# Altium PCB PCB copy.pcbdoc (part 2 of 2)
Units mm, origin at the board's own origin, x right, y up, seen from the top; angles counter-clockwise.
Board outline 125.72 x 116.32 mm, 2 copper layers (Top Layer, Bottom Layer); 242 components, 12 nets, 720 pads, 72 vias.
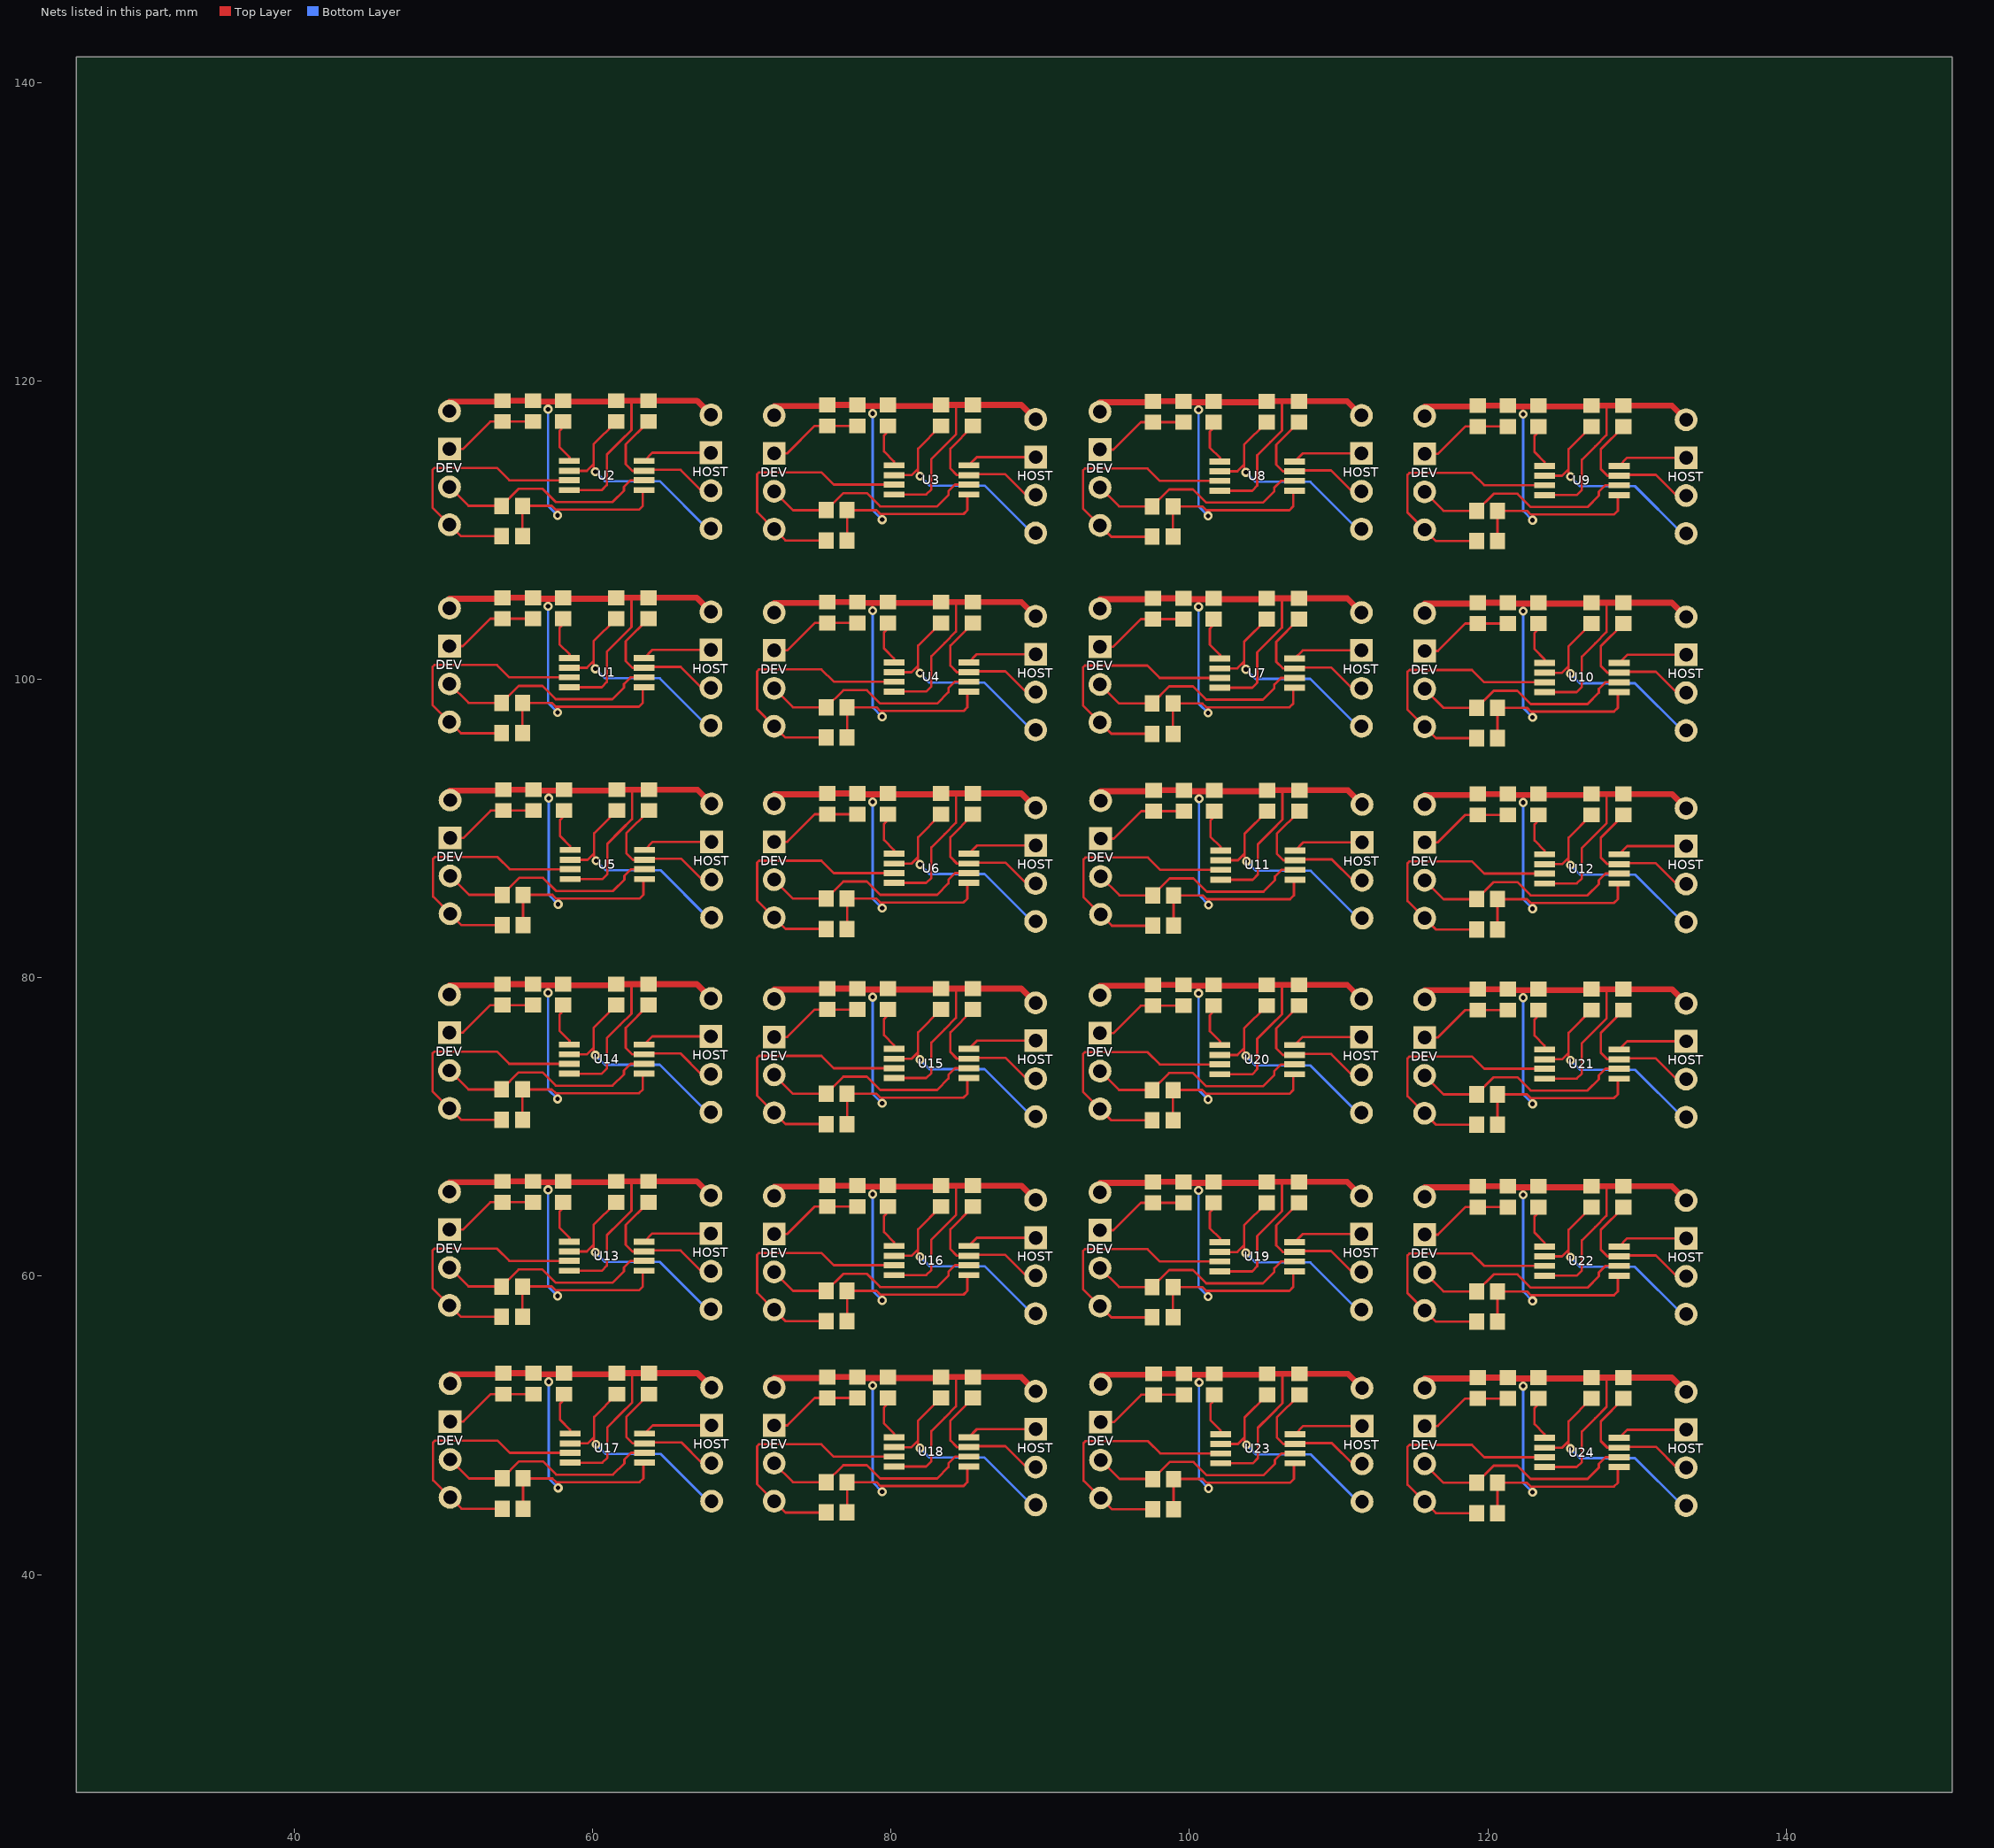
[diagram p2: the nets of this part, all layers, seen from the top]

## Via types
v1: diameter 0.61, hole 0.305, Top Layer to Bottom Layer, 72 vias

## Nets (pads, with @x,y where several pads share a name; then routed paths per layer and width w, separated by ;. In a path a pad name is that pad's centre, name@x,y a point inside that pad or via, vN(x,y) a via of type N, cw(c..) or ccw(c..) an arc to the next point about the centre after c; other vN are vias at no path point)
3.3VI2C: C1.1 C2.1 C3.1 C4.1 C5.1 C6.1 C7.1 C8.1 C9.1 C10.1 C11.1 C12.1 C13.1 C14.1 C15.1 C16.1 C17.1 C18.1 C19.1 C20.1 C21.1 C22.1 C23.1 C24.1 C25.1 C26.1 C27.1 C28.1 C29.1 C30.1 C31.1 C32.1 C33.1 C34.1 C35.1 C36.1 C37.1 C38.1 C39.1 C40.1 C41.1 C42.1 C43.1 C44.1 C45.1 C46.1 C47.1 C48.1 DEV.4 HOST.4 R1.2 R2.2 R3.2 R4.2 R5.2 R6.2 R7.2 R8.2 R9.2 R10.2 R11.2 R12.2 R13.2 R14.2 R15.2 R16.2 R17.2 R18.2 R19.2 R20.2 R21.2 R22.2 R23.2 R24.2 R25.2 R26.2 R27.2 R28.2 R29.2 R30.2 R31.2 R32.2 R33.2 R34.2 R35.2 R36.2 R37.2 R38.2 R39.2 R40.2 R41.2 R42.2 R43.2 R44.2 R45.2 R46.2 R47.2 R48.2 R49.2 R50.2 R51.2 R52.2 R53.2 R54.2 R55.2 R56.2 R57.2 R58.2 R59.2 R60.2 R61.2 R62.2 R63.2 R64.2 R65.2 R66.2 R67.2 R68.2 R69.2 R70.2 R71.2 R72.2 R73.2 R74.2 R75.2 R76.2 R77.2 R78.2 R79.2 R80.2 R81.2 R82.2 R83.2 R84.2 R85.2 R86.2 R87.2 R88.2 R89.2 R90.2 R91.2 R92.2 R93.2 R94.2 R95.2 R96.2 R97.2 R98.2 R99.2 R100.2 R101.2 R102.2 R103.2 R104.2 R105.2 R106.2 R107.2 R108.2 R109.2 R110.2 R111.2 R112.2 R113.2 R114.2 R115.2 R116.2 R117.2 R118.2 R119.2 R120.2 U1.1 U1.8 U2.1 U2.8 U3.1 U3.8 U4.1 U4.8 U5.1 U5.8 U6.1 U6.8 U7.1 U7.8 U8.1 U8.8 U9.1 U9.8 U10.1 U10.8 U11.1 U11.8 U12.1 U12.8 U13.1 U13.8 U14.1 U14.8 U15.1 U15.8 U16.1 U16.8 U17.1 U17.8 U18.1 U18.8 U19.1 U19.8 U20.1 U20.8 U21.1 U21.8 U22.1 U22.8 U23.1 U23.8 U24.1 U24.8 | length 1137.8
  Top Layer w0.16: R65.2@55.301,57.277 R64.2@55.301,59.309 57.268,59.309 57.522,59.055 63.11,59.055 63.364,59.309 63.364,60.274 U13.1@63.453,60.363 ; R70.2@55.301,70.485 R69.2@55.301,72.517 57.268,72.517 57.522,72.263 63.11,72.263 63.364,72.517 63.364,73.482 U14.1@63.453,73.571 ; R3.2@55.301,96.393 R1.2@55.301,98.425 57.268,98.425 57.522,98.171 63.11,98.171 63.364,98.425 63.364,99.39 U1.1@63.453,99.479 ; R10.2@55.301,109.601 R9.2@55.301,111.633 57.268,111.633 57.522,111.379 63.11,111.379 63.364,111.633 63.364,112.598 U2.1@63.453,112.687 ; R85.2@55.339,44.412 R84.2@55.339,46.444 57.306,46.444 57.56,46.19 63.148,46.19 63.402,46.444 63.402,47.409 U17.1@63.491,47.498 ; R25.2@55.339,83.528 R24.2@55.339,85.56 57.306,85.56 57.56,85.306 63.148,85.306 63.402,85.56 63.402,86.525 U5.1@63.491,86.614 ; 57.001,66.294 57.001,65.799 v1(57.014,65.786) ; 57.001,79.502 57.001,79.007 v1(57.014,78.994) ; 57.001,105.41 57.001,104.915 v1(57.014,104.902) ; 57.001,118.618 57.001,118.123 v1(57.014,118.11) ; 57.039,53.429 57.039,52.934 v1(57.052,52.921) ; 57.039,92.545 57.039,92.05 v1(57.052,92.037) ; v1(57.649,58.674) 57.65,58.675 57.65,59.055 ; v1(57.649,71.882) 57.65,71.883 57.65,72.263 ; v1(57.649,97.79) 57.65,97.791 57.65,98.171 ; v1(57.649,110.998) 57.65,110.999 57.65,111.379 ; v1(57.687,45.809) 57.689,45.81 57.689,46.19 ; v1(57.687,84.925) 57.689,84.926 57.689,85.306 ; U13.8@58.449,60.363 60.608,60.363 60.951,60.706 60.951,61.849 60.951,62.738 61.84,63.627 62.602,64.389 62.602,64.897 62.602,66.341 62.62,66.359 ; U14.8@58.449,73.571 60.608,73.571 60.951,73.914 60.951,75.057 60.951,75.946 61.84,76.835 62.602,77.597 62.602,78.105 62.602,79.549 62.62,79.567 ; U1.8@58.449,99.479 60.608,99.479 60.951,99.822 60.951,100.965 60.951,101.854 61.84,102.743 62.602,103.505 62.602,104.013 62.602,105.457 62.62,105.475 ; U2.8@58.449,112.687 60.608,112.687 60.951,113.03 60.951,114.173 60.951,115.062 61.84,115.951 62.602,116.713 62.602,117.221 62.602,118.665 62.62,118.683 ; U17.8@58.487,47.498 60.646,47.498 60.989,47.841 60.989,48.984 60.989,49.873 61.878,50.762 62.64,51.524 62.64,52.032 62.64,53.476 62.658,53.494 ; U5.8@58.487,86.614 60.646,86.614 60.989,86.957 60.989,88.1 60.989,88.989 61.878,89.878 62.64,90.64 62.64,91.148 62.64,92.592 62.658,92.61 ; R90.2@77.056,44.158 R89.2@77.056,46.19 79.023,46.19 79.277,45.936 84.865,45.936 85.119,46.19 85.119,47.155 U18.1@85.208,47.244 ; R80.2@77.056,56.985 R79.2@77.056,59.017 79.023,59.017 79.277,58.763 84.865,58.763 85.119,59.017 85.119,59.982 U16.1@85.208,60.071 ; R75.2@77.056,70.193 R74.2@77.056,72.225 79.023,72.225 79.277,71.971 84.865,71.971 85.119,72.225 85.119,73.19 U15.1@85.208,73.279 ; R30.2@77.056,83.274 R29.2@77.056,85.306 79.023,85.306 79.277,85.052 84.865,85.052 85.119,85.306 85.119,86.271 U6.1@85.208,86.36 ; R20.2@77.056,96.101 R19.2@77.056,98.133 79.023,98.133 79.277,97.879 84.865,97.879 85.119,98.133 85.119,99.098 U4.1@85.208,99.187 ; R15.2@77.056,109.309 R14.2@77.056,111.341 79.023,111.341 79.277,111.087 84.865,111.087 85.119,111.341 85.119,112.306 U3.1@85.208,112.395 ; 78.756,53.175 78.756,52.68 v1(78.769,52.667) ; 78.756,66.002 78.756,65.507 v1(78.769,65.494) ; 78.756,79.21 78.756,78.715 v1(78.769,78.702) ; 78.756,92.291 78.756,91.796 v1(78.769,91.783) ; 78.756,105.118 78.756,104.623 v1(78.769,104.61) ; 78.756,118.326 78.756,117.831 v1(78.769,117.818) ; v1(79.404,45.555) 79.406,45.556 79.406,45.936 ; v1(79.404,58.382) 79.406,58.383 79.406,58.763 ; v1(79.404,71.59) 79.406,71.591 79.406,71.971 ; v1(79.404,84.671) 79.406,84.672 79.406,85.052 ; v1(79.404,97.498) 79.406,97.499 79.406,97.879 ; v1(79.404,110.706) 79.406,110.707 79.406,111.087 ; U18.8@80.204,47.244 82.363,47.244 82.706,47.587 82.706,48.73 82.706,49.619 83.595,50.508 84.357,51.27 84.357,51.778 84.357,53.222 84.375,53.24 ; U16.8@80.204,60.071 82.363,60.071 82.706,60.414 82.706,61.557 82.706,62.446 83.595,63.335 84.357,64.097 84.357,64.605 84.357,66.049 84.375,66.067 ; U15.8@80.204,73.279 82.363,73.279 82.706,73.622 82.706,74.765 82.706,75.654 83.595,76.543 84.357,77.305 84.357,77.813 84.357,79.257 84.375,79.275 ; U6.8@80.204,86.36 82.363,86.36 82.706,86.703 82.706,87.846 82.706,88.735 83.595,89.624 84.357,90.386 84.357,90.894 84.357,92.338 84.375,92.356 ; U4.8@80.204,99.187 82.363,99.187 82.706,99.53 82.706,100.673 82.706,101.562 83.595,102.451 84.357,103.213 84.357,103.721 84.357,105.165 84.375,105.183 ; U3.8@80.204,112.395 82.363,112.395 82.706,112.738 82.706,113.881 82.706,114.77 83.595,115.659 84.357,116.421 84.357,116.929 84.357,118.373 84.375,118.391 ; R95.2@98.9,57.239 R94.2@98.9,59.271 100.867,59.271 101.121,59.017 106.709,59.017 106.963,59.271 106.963,60.236 U19.1@107.052,60.325 ; R100.2@98.9,70.447 R99.2@98.9,72.479 100.867,72.479 101.121,72.225 106.709,72.225 106.963,72.479 106.963,73.444 U20.1@107.052,73.533 ; R35.2@98.9,96.355 R34.2@98.9,98.387 100.867,98.387 101.121,98.133 106.709,98.133 106.963,98.387 106.963,99.352 U7.1@107.052,99.441 ; R40.2@98.9,109.563 R39.2@98.9,111.595 100.867,111.595 101.121,111.341 106.709,111.341 106.963,111.595 106.963,112.56 U8.1@107.052,112.649 ; R115.2@98.938,44.374 R114.2@98.938,46.406 100.905,46.406 101.159,46.152 106.747,46.152 107.001,46.406 107.001,47.371 U23.1@107.09,47.46 ; R55.2@98.938,83.49 R54.2@98.938,85.522 100.905,85.522 101.159,85.268 106.747,85.268 107.001,85.522 107.001,86.487 U11.1@107.09,86.576 ; 100.6,66.256 100.6,65.761 v1(100.613,65.748) ; 100.6,79.464 100.6,78.969 v1(100.613,78.956) ; 100.6,105.372 100.6,104.877 v1(100.613,104.864) ; 100.6,118.58 100.6,118.085 v1(100.613,118.072) ; 100.639,53.391 100.639,52.896 v1(100.651,52.883) ; 100.639,92.507 100.639,92.012 v1(100.651,91.999) ; v1(101.248,58.636) 101.25,58.637 101.25,59.017 ; v1(101.248,71.844) 101.25,71.845 101.25,72.225 ; v1(101.248,97.752) 101.25,97.753 101.25,98.133 ; v1(101.248,110.96) 101.25,110.961 101.25,111.341 ; v1(101.286,45.771) 101.288,45.772 101.288,46.152 ; v1(101.286,84.887) 101.288,84.888 101.288,85.268 ; U19.8@102.048,60.325 104.207,60.325 104.55,60.668 104.55,61.811 104.55,62.7 105.439,63.589 106.201,64.351 106.201,64.859 106.201,66.303 106.219,66.321 ; U20.8@102.048,73.533 104.207,73.533 104.55,73.876 104.55,75.019 104.55,75.908 105.439,76.797 106.201,77.559 106.201,78.067 106.201,79.511 106.219,79.529 ; U7.8@102.048,99.441 104.207,99.441 104.55,99.784 104.55,100.927 104.55,101.816 105.439,102.705 106.201,103.467 106.201,103.975 106.201,105.419 106.219,105.437 ; U8.8@102.048,112.649 104.207,112.649 104.55,112.992 104.55,114.135 104.55,115.024 105.439,115.913 106.201,116.675 106.201,117.183 106.201,118.627 106.219,118.645 ; U23.8@102.086,47.46 104.245,47.46 104.588,47.803 104.588,48.946 104.588,49.835 105.477,50.724 106.239,51.486 106.239,51.994 106.239,53.438 106.257,53.456 ; U11.8@102.086,86.576 104.245,86.576 104.588,86.919 104.588,88.062 104.588,88.951 105.477,89.84 106.239,90.602 106.239,91.11 106.239,92.554 106.257,92.572 ; R120.2@120.655,44.12 R119.2@120.655,46.152 122.622,46.152 122.876,45.898 128.464,45.898 128.718,46.152 128.718,47.117 U24.1@128.807,47.206 ; R110.2@120.655,56.947 R109.2@120.655,58.979 122.622,58.979 122.876,58.725 128.464,58.725 128.718,58.979 128.718,59.944 U22.1@128.807,60.033 ; R105.2@120.655,70.155 R104.2@120.655,72.187 122.622,72.187 122.876,71.933 128.464,71.933 128.718,72.187 128.718,73.152 U21.1@128.807,73.241 ; R60.2@120.655,83.236 R59.2@120.655,85.268 122.622,85.268 122.876,85.014 128.464,85.014 128.718,85.268 128.718,86.233 U12.1@128.807,86.322 ; R50.2@120.655,96.063 R49.2@120.655,98.095 122.622,98.095 122.876,97.841 128.464,97.841 128.718,98.095 128.718,99.06 U10.1@128.807,99.149 ; R45.2@120.655,109.271 R44.2@120.655,111.303 122.622,111.303 122.876,111.049 128.464,111.049 128.718,111.303 128.718,112.268 U9.1@128.807,112.357 ; 122.356,53.137 122.356,52.642 v1(122.368,52.629) ; 122.356,65.964 122.356,65.469 v1(122.368,65.456) ; 122.356,79.172 122.356,78.677 v1(122.368,78.664) ; 122.356,92.253 122.356,91.758 v1(122.368,91.745) ; 122.356,105.08 122.356,104.585 v1(122.368,104.572) ; 122.356,118.288 122.356,117.793 v1(122.368,117.78) ; v1(123.003,45.517) 123.005,45.518 123.005,45.898 ; v1(123.003,58.344) 123.005,58.345 123.005,58.725 ; v1(123.003,71.552) 123.005,71.553 123.005,71.933 ; v1(123.003,84.633) 123.005,84.634 123.005,85.014 ; v1(123.003,97.46) 123.005,97.461 123.005,97.841 ; v1(123.003,110.668) 123.005,110.669 123.005,111.049 ; U24.8@123.803,47.206 125.962,47.206 126.305,47.549 126.305,48.692 126.305,49.581 127.194,50.47 127.956,51.232 127.956,51.74 127.956,53.184 127.974,53.202 ; U22.8@123.803,60.033 125.962,60.033 126.305,60.376 126.305,61.519 126.305,62.408 127.194,63.297 127.956,64.059 127.956,64.567 127.956,66.011 127.974,66.029 ; U21.8@123.803,73.241 125.962,73.241 126.305,73.584 126.305,74.727 126.305,75.616 127.194,76.505 127.956,77.267 127.956,77.775 127.956,79.219 127.974,79.237 ; U12.8@123.803,86.322 125.962,86.322 126.305,86.665 126.305,87.808 126.305,88.697 127.194,89.586 127.956,90.348 127.956,90.856 127.956,92.3 127.974,92.318 ; U10.8@123.803,99.149 125.962,99.149 126.305,99.492 126.305,100.635 126.305,101.524 127.194,102.413 127.956,103.175 127.956,103.683 127.956,105.127 127.974,105.145 ; U9.8@123.803,112.357 125.962,112.357 126.305,112.7 126.305,113.843 126.305,114.732 127.194,115.621 127.956,116.383 127.956,116.891 127.956,118.335 127.974,118.353
  Top Layer w0.4: DEV.4@50.41,65.659 50.41,66.294 53.9,66.294 C26.1@53.966,66.359 ; DEV.4@50.41,78.867 50.41,79.502 53.9,79.502 C28.1@53.966,79.567 ; DEV.4@50.41,104.775 50.41,105.41 53.9,105.41 C2.1@53.966,105.475 ; DEV.4@50.41,117.983 50.41,118.618 53.9,118.618 C4.1@53.966,118.683 ; DEV.4@50.448,52.794 50.448,53.429 53.938,53.429 C34.1@54.004,53.494 ; DEV.4@50.448,91.91 50.448,92.545 53.938,92.545 C10.1@54.004,92.61 ; C26.1@53.966,66.359 55.49,66.359 C25.1@55.998,66.359 ; C28.1@53.966,79.567 55.49,79.567 C27.1@55.998,79.567 ; C2.1@53.966,105.475 55.49,105.475 C1.1@55.998,105.475 ; C4.1@53.966,118.683 55.49,118.683 C3.1@55.998,118.683 ; C34.1@54.004,53.494 55.528,53.494 C33.1@56.036,53.494 ; C10.1@54.004,92.61 55.528,92.61 C9.1@56.036,92.61 ; C25.1@56.125,66.294 R63.2@58.03,66.294 ; C27.1@56.125,79.502 R68.2@58.03,79.502 ; C1.1@56.125,105.41 R5.2@58.03,105.41 ; C3.1@56.125,118.618 R8.2@58.03,118.618 ; C33.1@56.163,53.429 R83.2@58.068,53.429 ; C9.1@56.163,92.545 R23.2@58.068,92.545 ; R63.2@58.03,66.359 57.903,66.294 61.52,66.294 R62.2@61.586,66.359 ; R68.2@58.03,79.567 57.903,79.502 61.52,79.502 R67.2@61.586,79.567 ; R5.2@58.03,105.475 57.903,105.41 61.52,105.41 R4.2@61.586,105.475 ; R8.2@58.03,118.683 57.903,118.618 61.52,118.618 R7.2@61.586,118.683 ; R83.2@58.068,53.494 57.941,53.429 61.558,53.429 R82.2@61.624,53.494 ; R23.2@58.068,92.61 57.941,92.545 61.558,92.545 R22.2@61.624,92.61 ; R62.2@61.586,66.359 R61.2@63.745,66.359 66.982,66.359 HOST.4@67.936,65.405 ; R67.2@61.586,79.567 R66.2@63.745,79.567 66.982,79.567 HOST.4@67.936,78.613 ; R4.2@61.586,105.475 R2.2@63.745,105.475 66.982,105.475 HOST.4@67.936,104.521 ; R7.2@61.586,118.683 R6.2@63.745,118.683 66.982,118.683 HOST.4@67.936,117.729 ; R82.2@61.624,53.494 R81.2@63.783,53.494 67.02,53.494 HOST.4@67.974,52.54 ; R22.2@61.624,92.61 R21.2@63.783,92.61 67.02,92.61 HOST.4@67.974,91.656 ; DEV.4@72.165,52.54 72.165,53.175 75.655,53.175 C36.1@75.721,53.24 ; DEV.4@72.165,65.367 72.165,66.002 75.655,66.002 C32.1@75.721,66.067 ; DEV.4@72.165,78.575 72.165,79.21 75.655,79.21 C30.1@75.721,79.275 ; DEV.4@72.165,91.656 72.165,92.291 75.655,92.291 C12.1@75.721,92.356 ; DEV.4@72.165,104.483 72.165,105.118 75.655,105.118 C8.1@75.721,105.183 ; DEV.4@72.165,117.691 72.165,118.326 75.655,118.326 C6.1@75.721,118.391 ; C36.1@75.721,53.24 77.245,53.24 C35.1@77.753,53.24 ; C32.1@75.721,66.067 77.245,66.067 C31.1@77.753,66.067 ; C30.1@75.721,79.275 77.245,79.275 C29.1@77.753,79.275 ; C12.1@75.721,92.356 77.245,92.356 C11.1@77.753,92.356 ; C8.1@75.721,105.183 77.245,105.183 C7.1@77.753,105.183 ; C6.1@75.721,118.391 77.245,118.391 C5.1@77.753,118.391 ; C35.1@77.88,53.175 R88.2@79.785,53.175 ; C31.1@77.88,66.002 R78.2@79.785,66.002 ; C29.1@77.88,79.21 R73.2@79.785,79.21 ; C11.1@77.88,92.291 R28.2@79.785,92.291 ; C7.1@77.88,105.118 R18.2@79.785,105.118 ; C5.1@77.88,118.326 R13.2@79.785,118.326 ; R88.2@79.785,53.24 79.658,53.175 83.275,53.175 R87.2@83.341,53.24 ; R78.2@79.785,66.067 79.658,66.002 83.275,66.002 R77.2@83.341,66.067 ; R73.2@79.785,79.275 79.658,79.21 83.275,79.21 R72.2@83.341,79.275 ; R28.2@79.785,92.356 79.658,92.291 83.275,92.291 R27.2@83.341,92.356 ; R18.2@79.785,105.183 79.658,105.118 83.275,105.118 R17.2@83.341,105.183 ; R13.2@79.785,118.391 79.658,118.326 83.275,118.326 R12.2@83.341,118.391 ; R87.2@83.341,53.24 R86.2@85.5,53.24 88.737,53.24 HOST.4@89.691,52.286 ; R77.2@83.341,66.067 R76.2@85.5,66.067 88.737,66.067 HOST.4@89.691,65.113 ; R72.2@83.341,79.275 R71.2@85.5,79.275 88.737,79.275 HOST.4@89.691,78.321 ; R27.2@83.341,92.356 R26.2@85.5,92.356 88.737,92.356 HOST.4@89.691,91.402 ; R17.2@83.341,105.183 R16.2@85.5,105.183 88.737,105.183 HOST.4@89.691,104.229 ; R12.2@83.341,118.391 R11.2@85.5,118.391 88.737,118.391 HOST.4@89.691,117.437 ; DEV.4@94.009,65.621 94.009,66.256 97.499,66.256 C38.1@97.565,66.321 ; DEV.4@94.009,78.829 94.009,79.464 97.499,79.464 C40.1@97.565,79.529 ; DEV.4@94.009,104.737 94.009,105.372 97.499,105.372 C14.1@97.565,105.437 ; DEV.4@94.009,117.945 94.009,118.58 97.499,118.58 C16.1@97.565,118.645 ; DEV.4@94.047,52.756 94.047,53.391 97.537,53.391 C46.1@97.603,53.456 ; DEV.4@94.047,91.872 94.047,92.507 97.537,92.507 C22.1@97.603,92.572 ; C38.1@97.565,66.321 99.089,66.321 C37.1@99.597,66.321 ; C40.1@97.565,79.529 99.089,79.529 C39.1@99.597,79.529 ; C14.1@97.565,105.437 99.089,105.437 C13.1@99.597,105.437 ; C16.1@97.565,118.645 99.089,118.645 C15.1@99.597,118.645 ; C46.1@97.603,53.456 99.127,53.456 C45.1@99.635,53.456 ; C22.1@97.603,92.572 99.127,92.572 C21.1@99.635,92.572 ; C37.1@99.724,66.256 R93.2@101.629,66.256 ; C39.1@99.724,79.464 R98.2@101.629,79.464 ; C13.1@99.724,105.372 R33.2@101.629,105.372 ; C15.1@99.724,118.58 R38.2@101.629,118.58 ; C45.1@99.762,53.391 R113.2@101.667,53.391 ; C21.1@99.762,92.507 R53.2@101.667,92.507 ; R93.2@101.629,66.321 101.502,66.256 105.119,66.256 R92.2@105.185,66.321 ; R98.2@101.629,79.529 101.502,79.464 105.119,79.464 R97.2@105.185,79.529 ; R33.2@101.629,105.437 101.502,105.372 105.119,105.372 R32.2@105.185,105.437 ; R38.2@101.629,118.645 101.502,118.58 105.119,118.58 R37.2@105.185,118.645 ; R113.2@101.667,53.456 101.54,53.391 105.157,53.391 R112.2@105.223,53.456 ; R53.2@101.667,92.572 101.54,92.507 105.157,92.507 R52.2@105.223,92.572 ; R92.2@105.185,66.321 R91.2@107.344,66.321 110.581,66.321 HOST.4@111.535,65.367 ; R97.2@105.185,79.529 R96.2@107.344,79.529 110.581,79.529 HOST.4@111.535,78.575 ; R32.2@105.185,105.437 R31.2@107.344,105.437 110.581,105.437 HOST.4@111.535,104.483 ; R37.2@105.185,118.645 R36.2@107.344,118.645 110.581,118.645 HOST.4@111.535,117.691 ; R112.2@105.223,53.456 R111.2@107.382,53.456 110.619,53.456 HOST.4@111.573,52.502 ; R52.2@105.223,92.572 R51.2@107.382,92.572 110.619,92.572 HOST.4@111.573,91.618 ; DEV.4@115.764,52.502 115.764,53.137 119.254,53.137 C48.1@119.32,53.202 ; DEV.4@115.764,65.329 115.764,65.964 119.254,65.964 C44.1@119.32,66.029 ; DEV.4@115.764,78.537 115.764,79.172 119.254,79.172 C42.1@119.32,79.237 ; DEV.4@115.764,91.618 115.764,92.253 119.254,92.253 C24.1@119.32,92.318 ; DEV.4@115.764,104.445 115.764,105.08 119.254,105.08 C20.1@119.32,105.145 ; DEV.4@115.764,117.653 115.764,118.288 119.254,118.288 C18.1@119.32,118.353 ; C48.1@119.32,53.202 120.844,53.202 C47.1@121.352,53.202 ; C44.1@119.32,66.029 120.844,66.029 C43.1@121.352,66.029 ; C42.1@119.32,79.237 120.844,79.237 C41.1@121.352,79.237 ; C24.1@119.32,92.318 120.844,92.318 C23.1@121.352,92.318 ; C20.1@119.32,105.145 120.844,105.145 C19.1@121.352,105.145 ; C18.1@119.32,118.353 120.844,118.353 C17.1@121.352,118.353 ; C47.1@121.479,53.137 R118.2@123.384,53.137 ; C43.1@121.479,65.964 R108.2@123.384,65.964 ; C41.1@121.479,79.172 R103.2@123.384,79.172 ; C23.1@121.479,92.253 R58.2@123.384,92.253 ; C19.1@121.479,105.08 R48.2@123.384,105.08 ; C17.1@121.479,118.288 R43.2@123.384,118.288 ; R118.2@123.384,53.202 123.257,53.137 126.874,53.137 R117.2@126.94,53.202 ; R108.2@123.384,66.029 123.257,65.964 126.874,65.964 R107.2@126.94,66.029 ; R103.2@123.384,79.237 123.257,79.172 126.874,79.172 R102.2@126.94,79.237 ; R58.2@123.384,92.318 123.257,92.253 126.874,92.253 R57.2@126.94,92.318 ; R48.2@123.384,105.145 123.257,105.08 126.874,105.08 R47.2@126.94,105.145 ; R43.2@123.384,118.353 123.257,118.288 126.874,118.288 R42.2@126.94,118.353 ; R117.2@126.94,53.202 R116.2@129.099,53.202 132.336,53.202 HOST.4@133.29,52.248 ; R107.2@126.94,66.029 R106.2@129.099,66.029 132.336,66.029 HOST.4@133.29,65.075 ; R102.2@126.94,79.237 R101.2@129.099,79.237 132.336,79.237 HOST.4@133.29,78.283 ; R57.2@126.94,92.318 R56.2@129.099,92.318 132.336,92.318 HOST.4@133.29,91.364 ; R47.2@126.94,105.145 R46.2@129.099,105.145 132.336,105.145 HOST.4@133.29,104.191 ; R42.2@126.94,118.353 R41.2@129.099,118.353 132.336,118.353 HOST.4@133.29,117.399
  Bottom Layer w0.16: v1(57.014,65.786) 57.014,59.309 v1(57.649,58.674) ; v1(57.014,78.994) 57.014,72.517 v1(57.649,71.882) ; v1(57.014,104.902) 57.014,98.425 v1(57.649,97.79) ; v1(57.014,118.11) 57.014,111.633 v1(57.649,110.998) ; v1(57.052,52.921) 57.052,46.444 v1(57.687,45.809) ; v1(57.052,92.037) 57.052,85.56 v1(57.687,84.925) ; v1(78.769,52.667) 78.769,46.19 v1(79.404,45.555) ; v1(78.769,65.494) 78.769,59.017 v1(79.404,58.382) ; v1(78.769,78.702) 78.769,72.225 v1(79.404,71.59) ; v1(78.769,91.783) 78.769,85.306 v1(79.404,84.671) ; v1(78.769,104.61) 78.769,98.133 v1(79.404,97.498) ; v1(78.769,117.818) 78.769,111.341 v1(79.404,110.706) ; v1(100.613,65.748) 100.613,59.271 v1(101.248,58.636) ; v1(100.613,78.956) 100.613,72.479 v1(101.248,71.844) ; v1(100.613,104.864) 100.613,98.387 v1(101.248,97.752) ; v1(100.613,118.072) 100.613,111.595 v1(101.248,110.96) ; v1(100.651,52.883) 100.651,46.406 v1(101.286,45.771) ; v1(100.651,91.999) 100.651,85.522 v1(101.286,84.887) ; v1(122.368,52.629) 122.368,46.152 v1(123.003,45.517) ; v1(122.368,65.456) 122.368,58.979 v1(123.003,58.344) ; v1(122.368,78.664) 122.368,72.187 v1(123.003,71.552) ; v1(122.368,91.745) 122.368,85.268 v1(123.003,84.633) ; v1(122.368,104.572) 122.368,98.095 v1(123.003,97.46) ; v1(122.368,117.78) 122.368,111.303 v1(123.003,110.668)
GND: C1.2 C2.2 C3.2 C4.2 C5.2 C6.2 C7.2 C8.2 C9.2 C10.2 C11.2 C12.2 C13.2 C14.2 C15.2 C16.2 C17.2 C18.2 C19.2 C20.2 C21.2 C22.2 C23.2 C24.2 C25.2 C26.2 C27.2 C28.2 C29.2 C30.2 C31.2 C32.2 C33.2 C34.2 C35.2 C36.2 C37.2 C38.2 C39.2 C40.2 C41.2 C42.2 C43.2 C44.2 C45.2 C46.2 C47.2 C48.2 DEV.3 HOST.3 U1.4 U2.4 U3.4 U4.4 U5.4 U6.4 U7.4 U8.4 U9.4 U10.4 U11.4 U12.4 U13.4 U14.4 U15.4 U16.4 U17.4 U18.4 U19.4 U20.4 U21.4 U22.4 U23.4 U24.4 | length 265.5
  Top Layer w0.16: DEV.3@50.41,63.119 51.299,63.119 53.139,64.959 C26.2@53.966,64.959 55.49,64.959 C25.2@55.998,64.897 ; DEV.3@50.41,76.327 51.299,76.327 53.139,78.167 C28.2@53.966,78.167 55.49,78.167 C27.2@55.998,78.105 ; DEV.3@50.41,102.235 51.299,102.235 53.139,104.075 C2.2@53.966,104.075 55.49,104.075 C1.2@55.998,104.013 ; DEV.3@50.41,115.443 51.299,115.443 53.139,117.283 C4.2@53.966,117.283 55.49,117.283 C3.2@55.998,117.221 ; DEV.3@50.448,50.254 51.337,50.254 53.177,52.094 C34.2@54.004,52.094 55.528,52.094 C33.2@56.036,52.032 ; DEV.3@50.448,89.37 51.337,89.37 53.177,91.21 C10.2@54.004,91.21 55.528,91.21 C9.2@56.036,91.148 ; U13.4@63.453,62.319 63.999,62.865 HOST.3@67.936,62.865 ; U14.4@63.453,75.527 63.999,76.073 HOST.3@67.936,76.073 ; U1.4@63.453,101.435 63.999,101.981 HOST.3@67.936,101.981 ; U2.4@63.453,114.643 63.999,115.189 HOST.3@67.936,115.189 ; U17.4@63.491,49.454 64.037,50 HOST.3@67.974,50 ; U5.4@63.491,88.57 64.037,89.116 HOST.3@67.974,89.116 ; DEV.3@72.165,50 73.054,50 74.894,51.84 C36.2@75.721,51.84 77.245,51.84 C35.2@77.753,51.778 ; DEV.3@72.165,62.827 73.054,62.827 74.894,64.667 C32.2@75.721,64.667 77.245,64.667 C31.2@77.753,64.605 ; DEV.3@72.165,76.035 73.054,76.035 74.894,77.875 C30.2@75.721,77.875 77.245,77.875 C29.2@77.753,77.813 ; DEV.3@72.165,89.116 73.054,89.116 74.894,90.956 C12.2@75.721,90.956 77.245,90.956 C11.2@77.753,90.894 ; DEV.3@72.165,101.943 73.054,101.943 74.894,103.783 C8.2@75.721,103.783 77.245,103.783 C7.2@77.753,103.721 ; DEV.3@72.165,115.151 73.054,115.151 74.894,116.991 C6.2@75.721,116.991 77.245,116.991 C5.2@77.753,116.929 ; U18.4@85.208,49.2 85.754,49.746 HOST.3@89.691,49.746 ; U16.4@85.208,62.027 85.754,62.573 HOST.3@89.691,62.573 ; U15.4@85.208,75.235 85.754,75.781 HOST.3@89.691,75.781 ; U6.4@85.208,88.316 85.754,88.862 HOST.3@89.691,88.862 ; U4.4@85.208,101.143 85.754,101.689 HOST.3@89.691,101.689 ; U3.4@85.208,114.351 85.754,114.897 HOST.3@89.691,114.897 ; DEV.3@94.009,63.081 94.898,63.081 96.738,64.921 C38.2@97.565,64.921 99.089,64.921 C37.2@99.597,64.859 ; DEV.3@94.009,76.289 94.898,76.289 96.738,78.129 C40.2@97.565,78.129 99.089,78.129 C39.2@99.597,78.067 ; DEV.3@94.009,102.197 94.898,102.197 96.738,104.037 C14.2@97.565,104.037 99.089,104.037 C13.2@99.597,103.975 ; DEV.3@94.009,115.405 94.898,115.405 96.738,117.245 C16.2@97.565,117.245 99.089,117.245 C15.2@99.597,117.183 ; DEV.3@94.047,50.216 94.936,50.216 96.776,52.056 C46.2@97.603,52.056 99.127,52.056 C45.2@99.635,51.994 ; DEV.3@94.047,89.332 94.936,89.332 96.776,91.172 C22.2@97.603,91.172 99.127,91.172 C21.2@99.635,91.11 ; U19.4@107.052,62.281 107.598,62.827 HOST.3@111.535,62.827 ; U20.4@107.052,75.489 107.598,76.035 HOST.3@111.535,76.035 ; U7.4@107.052,101.397 107.598,101.943 HOST.3@111.535,101.943 ; U8.4@107.052,114.605 107.598,115.151 HOST.3@111.535,115.151 ; U23.4@107.09,49.416 107.636,49.962 HOST.3@111.573,49.962 ; U11.4@107.09,88.532 107.636,89.078 HOST.3@111.573,89.078 ; DEV.3@115.764,49.962 116.653,49.962 118.493,51.802 C48.2@119.32,51.802 120.844,51.802 C47.2@121.352,51.74 ; DEV.3@115.764,62.789 116.653,62.789 118.493,64.629 C44.2@119.32,64.629 120.844,64.629 C43.2@121.352,64.567 ; DEV.3@115.764,75.997 116.653,75.997 118.493,77.837 C42.2@119.32,77.837 120.844,77.837 C41.2@121.352,77.775 ; DEV.3@115.764,89.078 116.653,89.078 118.493,90.918 C24.2@119.32,90.918 120.844,90.918 C23.2@121.352,90.856 ; DEV.3@115.764,101.905 116.653,101.905 118.493,103.745 C20.2@119.32,103.745 120.844,103.745 C19.2@121.352,103.683 ; DEV.3@115.764,115.113 116.653,115.113 118.493,116.953 C18.2@119.32,116.953 120.844,116.953 C17.2@121.352,116.891 ; U24.4@128.807,49.162 129.353,49.708 HOST.3@133.29,49.708 ; U22.4@128.807,61.989 129.353,62.535 HOST.3@133.29,62.535 ; U21.4@128.807,75.197 129.353,75.743 HOST.3@133.29,75.743 ; U12.4@128.807,88.278 129.353,88.824 HOST.3@133.29,88.824 ; U10.4@128.807,101.105 129.353,101.651 HOST.3@133.29,101.651 ; U9.4@128.807,114.313 129.353,114.859 HOST.3@133.29,114.859
S$67: 
S$69: 
S$394: 
S$398: 
S$7664: 
SCL0: DEV.2 R1.1 R9.1 R14.1 R19.1 R24.1 R29.1 R34.1 R39.1 R44.1 R49.1 R54.1 R59.1 R64.1 R69.1 R74.1 R79.1 R84.1 R89.1 R94.1 R99.1 R104.1 R109.1 R114.1 R119.1 U1.2 U2.2 U3.2 U4.2 U5.2 U6.2 U7.2 U8.2 U9.2 U10.2 U11.2 U12.2 U13.2 U14.2 U15.2 U16.2 U17.2 U18.2 U19.2 U20.2 U21.2 U22.2 U23.2 U24.2 | length 363.9
  Top Layer w0.16: DEV.2@50.41,60.579 51.68,59.309 R64.1@53.901,59.309 55.044,60.452 56.633,60.452 57.522,59.563 61.332,59.563 62.094,60.325 62.094,60.579 62.539,61.023 U13.2@63.453,61.023 ; DEV.2@50.41,73.787 51.68,72.517 R69.1@53.901,72.517 55.044,73.66 56.633,73.66 57.522,72.771 61.332,72.771 62.094,73.533 62.094,73.787 62.539,74.231 U14.2@63.453,74.231 ; DEV.2@50.41,99.695 51.68,98.425 R1.1@53.901,98.425 55.044,99.568 56.633,99.568 57.522,98.679 61.332,98.679 62.094,99.441 62.094,99.695 62.539,100.139 U1.2@63.453,100.139 ; DEV.2@50.41,112.903 51.68,111.633 R9.1@53.901,111.633 55.044,112.776 56.633,112.776 57.522,111.887 61.332,111.887 62.094,112.649 62.094,112.903 62.539,113.347 U2.2@63.453,113.347 ; DEV.2@50.448,47.714 51.718,46.444 R84.1@53.939,46.444 55.082,47.587 56.671,47.587 57.56,46.698 61.37,46.698 62.132,47.46 62.132,47.714 62.577,48.158 U17.2@63.491,48.158 ; DEV.2@50.448,86.83 51.718,85.56 R24.1@53.939,85.56 55.082,86.703 56.671,86.703 57.56,85.814 61.37,85.814 62.132,86.576 62.132,86.83 62.577,87.274 U5.2@63.491,87.274 ; DEV.2@72.165,47.46 73.435,46.19 R89.1@75.656,46.19 76.799,47.333 78.388,47.333 79.277,46.444 83.087,46.444 83.849,47.206 83.849,47.46 84.294,47.904 U18.2@85.208,47.904 ; DEV.2@72.165,60.287 73.435,59.017 R79.1@75.656,59.017 76.799,60.16 78.388,60.16 79.277,59.271 83.087,59.271 83.849,60.033 83.849,60.287 84.294,60.731 U16.2@85.208,60.731 ; DEV.2@72.165,73.495 73.435,72.225 R74.1@75.656,72.225 76.799,73.368 78.388,73.368 79.277,72.479 83.087,72.479 83.849,73.241 83.849,73.495 84.294,73.939 U15.2@85.208,73.939 ; DEV.2@72.165,86.576 73.435,85.306 R29.1@75.656,85.306 76.799,86.449 78.388,86.449 79.277,85.56 83.087,85.56 83.849,86.322 83.849,86.576 84.294,87.02 U6.2@85.208,87.02 ; DEV.2@72.165,99.403 73.435,98.133 R19.1@75.656,98.133 76.799,99.276 78.388,99.276 79.277,98.387 83.087,98.387 83.849,99.149 83.849,99.403 84.294,99.847 U4.2@85.208,99.847 ; DEV.2@72.165,112.611 73.435,111.341 R14.1@75.656,111.341 76.799,112.484 78.388,112.484 79.277,111.595 83.087,111.595 83.849,112.357 83.849,112.611 84.294,113.055 U3.2@85.208,113.055 ; DEV.2@94.009,60.541 95.279,59.271 R94.1@97.5,59.271 98.643,60.414 100.232,60.414 101.121,59.525 104.931,59.525 105.693,60.287 105.693,60.541 106.138,60.985 U19.2@107.052,60.985 ; DEV.2@94.009,73.749 95.279,72.479 R99.1@97.5,72.479 98.643,73.622 100.232,73.622 101.121,72.733 104.931,72.733 105.693,73.495 105.693,73.749 106.138,74.193 U20.2@107.052,74.193 ; DEV.2@94.009,99.657 95.279,98.387 R34.1@97.5,98.387 98.643,99.53 100.232,99.53 101.121,98.641 104.931,98.641 105.693,99.403 105.693,99.657 106.138,100.101 U7.2@107.052,100.101 ; DEV.2@94.009,112.865 95.279,111.595 R39.1@97.5,111.595 98.643,112.738 100.232,112.738 101.121,111.849 104.931,111.849 105.693,112.611 105.693,112.865 106.138,113.309 U8.2@107.052,113.309 ; DEV.2@94.047,47.676 95.317,46.406 R114.1@97.538,46.406 98.681,47.549 100.27,47.549 101.159,46.66 104.969,46.66 105.731,47.422 105.731,47.676 106.176,48.12 U23.2@107.09,48.12 ; DEV.2@94.047,86.792 95.317,85.522 R54.1@97.538,85.522 98.681,86.665 100.27,86.665 101.159,85.776 104.969,85.776 105.731,86.538 105.731,86.792 106.176,87.236 U11.2@107.09,87.236 ; DEV.2@115.764,47.422 117.034,46.152 R119.1@119.255,46.152 120.398,47.295 121.987,47.295 122.876,46.406 126.686,46.406 127.448,47.168 127.448,47.422 127.893,47.866 U24.2@128.807,47.866 ; DEV.2@115.764,60.249 117.034,58.979 R109.1@119.255,58.979 120.398,60.122 121.987,60.122 122.876,59.233 126.686,59.233 127.448,59.995 127.448,60.249 127.893,60.693 U22.2@128.807,60.693 ; DEV.2@115.764,73.457 117.034,72.187 R104.1@119.255,72.187 120.398,73.33 121.987,73.33 122.876,72.441 126.686,72.441 127.448,73.203 127.448,73.457 127.893,73.901 U21.2@128.807,73.901 ; DEV.2@115.764,86.538 117.034,85.268 R59.1@119.255,85.268 120.398,86.411 121.987,86.411 122.876,85.522 126.686,85.522 127.448,86.284 127.448,86.538 127.893,86.982 U12.2@128.807,86.982 ; DEV.2@115.764,99.365 117.034,98.095 R49.1@119.255,98.095 120.398,99.238 121.987,99.238 122.876,98.349 126.686,98.349 127.448,99.111 127.448,99.365 127.893,99.809 U10.2@128.807,99.809 ; DEV.2@115.764,112.573 117.034,111.303 R44.1@119.255,111.303 120.398,112.446 121.987,112.446 122.876,111.557 126.686,111.557 127.448,112.319 127.448,112.573 127.893,113.017 U9.2@128.807,113.017
SCLOUT: HOST.2 R2.1 R6.1 R11.1 R16.1 R21.1 R26.1 R31.1 R36.1 R41.1 R46.1 R51.1 R56.1 R61.1 R66.1 R71.1 R76.1 R81.1 R86.1 R91.1 R96.1 R101.1 R106.1 R111.1 R116.1 U1.3 U2.3 U3.3 U4.3 U5.3 U6.3 U7.3 U8.3 U9.3 U10.3 U11.3 U12.3 U13.3 U14.3 U15.3 U16.3 U17.3 U18.3 U19.3 U20.3 U21.3 U22.3 U23.3 U24.3 | length 239.8
  Top Layer w0.16: R61.1@63.745,64.959 62.221,63.435 62.221,62.103 62.666,61.658 U13.3@63.453,61.658 63.516,61.722 65.904,61.722 67.301,60.325 HOST.2@67.936,60.325 ; R66.1@63.745,78.167 62.221,76.643 62.221,75.311 62.666,74.867 U14.3@63.453,74.867 63.516,74.93 65.904,74.93 67.301,73.533 HOST.2@67.936,73.533 ; R2.1@63.745,104.075 62.221,102.551 62.221,101.219 62.666,100.774 U1.3@63.453,100.774 63.516,100.838 65.904,100.838 67.301,99.441 HOST.2@67.936,99.441 ; R6.1@63.745,117.283 62.221,115.759 62.221,114.427 62.666,113.983 U2.3@63.453,113.983 63.516,114.046 65.904,114.046 67.301,112.649 HOST.2@67.936,112.649 ; R81.1@63.783,52.094 62.259,50.57 62.259,49.238 62.704,48.793 U17.3@63.491,48.793 63.555,48.857 65.942,48.857 67.339,47.46 HOST.2@67.974,47.46 ; R21.1@63.783,91.21 62.259,89.686 62.259,88.354 62.704,87.909 U5.3@63.491,87.909 63.555,87.973 65.942,87.973 67.339,86.576 HOST.2@67.974,86.576 ; R86.1@85.5,51.84 83.976,50.316 83.976,48.984 84.421,48.539 U18.3@85.208,48.539 85.272,48.603 87.659,48.603 89.056,47.206 HOST.2@89.691,47.206 ; R76.1@85.5,64.667 83.976,63.143 83.976,61.811 84.421,61.366 U16.3@85.208,61.366 85.272,61.43 87.659,61.43 89.056,60.033 HOST.2@89.691,60.033 ; R71.1@85.5,77.875 83.976,76.351 83.976,75.019 84.421,74.574 U15.3@85.208,74.574 85.272,74.638 87.659,74.638 89.056,73.241 HOST.2@89.691,73.241 ; R26.1@85.5,90.956 83.976,89.432 83.976,88.1 84.421,87.655 U6.3@85.208,87.655 85.272,87.719 87.659,87.719 89.056,86.322 HOST.2@89.691,86.322 ; R16.1@85.5,103.783 83.976,102.259 83.976,100.927 84.421,100.482 U4.3@85.208,100.482 85.272,100.546 87.659,100.546 89.056,99.149 HOST.2@89.691,99.149 ; R11.1@85.5,116.991 83.976,115.467 83.976,114.135 84.421,113.69 U3.3@85.208,113.69 85.272,113.754 87.659,113.754 89.056,112.357 HOST.2@89.691,112.357 ; R91.1@107.344,64.921 105.82,63.397 105.82,62.065 106.265,61.62 U19.3@107.052,61.62 107.116,61.684 109.503,61.684 110.9,60.287 HOST.2@111.535,60.287 ; R96.1@107.344,78.129 105.82,76.605 105.82,75.273 106.265,74.828 U20.3@107.052,74.828 107.116,74.892 109.503,74.892 110.9,73.495 HOST.2@111.535,73.495 ; R31.1@107.344,104.037 105.82,102.513 105.82,101.181 106.265,100.736 U7.3@107.052,100.736 107.116,100.8 109.503,100.8 110.9,99.403 HOST.2@111.535,99.403 ; R36.1@107.344,117.245 105.82,115.721 105.82,114.389 106.265,113.944 U8.3@107.052,113.944 107.116,114.008 109.503,114.008 110.9,112.611 HOST.2@111.535,112.611 ; R111.1@107.382,52.056 105.858,50.532 105.858,49.2 106.303,48.755 U23.3@107.09,48.755 107.154,48.819 109.541,48.819 110.938,47.422 HOST.2@111.573,47.422 ; R51.1@107.382,91.172 105.858,89.648 105.858,88.316 106.303,87.871 U11.3@107.09,87.871 107.154,87.935 109.541,87.935 110.938,86.538 HOST.2@111.573,86.538 ; R116.1@129.099,51.802 127.575,50.278 127.575,48.946 128.02,48.501 U24.3@128.807,48.501 128.871,48.565 131.258,48.565 132.655,47.168 HOST.2@133.29,47.168 ; R106.1@129.099,64.629 127.575,63.105 127.575,61.773 128.02,61.328 U22.3@128.807,61.328 128.871,61.392 131.258,61.392 132.655,59.995 HOST.2@133.29,59.995 ; R101.1@129.099,77.837 127.575,76.313 127.575,74.981 128.02,74.536 U21.3@128.807,74.536 128.871,74.6 131.258,74.6 132.655,73.203 HOST.2@133.29,73.203 ; R56.1@129.099,90.918 127.575,89.394 127.575,88.062 128.02,87.617 U12.3@128.807,87.617 128.871,87.681 131.258,87.681 132.655,86.284 HOST.2@133.29,86.284 ; R46.1@129.099,103.745 127.575,102.221 127.575,100.889 128.02,100.444 U10.3@128.807,100.444 128.871,100.508 131.258,100.508 132.655,99.111 HOST.2@133.29,99.111 ; R41.1@129.099,116.953 127.575,115.429 127.575,114.097 128.02,113.652 U9.3@128.807,113.652 128.871,113.716 131.258,113.716 132.655,112.319 HOST.2@133.29,112.319
SDA0: DEV.1 R3.1 R10.1 R15.1 R20.1 R25.1 R30.1 R35.1 R40.1 R45.1 R50.1 R55.1 R60.1 R65.1 R70.1 R75.1 R80.1 R85.1 R90.1 R95.1 R100.1 R105.1 R110.1 R115.1 R120.1 U1.7 U2.7 U3.7 U4.7 U5.7 U6.7 U7.7 U8.7 U9.7 U10.7 U11.7 U12.7 U13.7 U14.7 U15.7 U16.7 U17.7 U18.7 U19.7 U20.7 U21.7 U22.7 U23.7 U24.7 | length 421
  Top Layer w0.16: R65.1@53.901,57.277 51.934,57.277 51.172,57.277 DEV.1@50.41,58.039 49.267,59.182 49.267,59.309 49.267,61.722 49.394,61.849 53.585,61.849 54.411,61.023 U13.7@58.449,61.023 ; R70.1@53.901,70.485 51.934,70.485 51.172,70.485 DEV.1@50.41,71.247 49.267,72.39 49.267,72.517 49.267,74.93 49.394,75.057 53.585,75.057 54.411,74.231 U14.7@58.449,74.231 ; R3.1@53.901,96.393 51.934,96.393 51.172,96.393 DEV.1@50.41,97.155 49.267,98.298 49.267,98.425 49.267,100.838 49.394,100.965 53.585,100.965 54.411,100.139 U1.7@58.449,100.139 ; R10.1@53.901,109.601 51.934,109.601 51.172,109.601 DEV.1@50.41,110.363 49.267,111.506 49.267,111.633 49.267,114.046 49.394,114.173 53.585,114.173 54.411,113.347 U2.7@58.449,113.347 ; R85.1@53.939,44.412 51.972,44.412 51.21,44.412 DEV.1@50.448,45.174 49.305,46.317 49.305,46.444 49.305,48.857 49.432,48.984 53.623,48.984 54.449,48.158 U17.7@58.487,48.158 ; R25.1@53.939,83.528 51.972,83.528 51.21,83.528 DEV.1@50.448,84.29 49.305,85.433 49.305,85.56 49.305,87.973 49.432,88.1 53.623,88.1 54.449,87.274 U5.7@58.487,87.274 ; R90.1@75.656,44.158 73.689,44.158 72.927,44.158 DEV.1@72.165,44.92 71.022,46.063 71.022,46.19 71.022,48.603 71.149,48.73 75.34,48.73 76.166,47.904 U18.7@80.204,47.904 ; R80.1@75.656,56.985 73.689,56.985 72.927,56.985 DEV.1@72.165,57.747 71.022,58.89 71.022,59.017 71.022,61.43 71.149,61.557 75.34,61.557 76.166,60.731 U16.7@80.204,60.731 ; R75.1@75.656,70.193 73.689,70.193 72.927,70.193 DEV.1@72.165,70.955 71.022,72.098 71.022,72.225 71.022,74.638 71.149,74.765 75.34,74.765 76.166,73.939 U15.7@80.204,73.939 ; R30.1@75.656,83.274 73.689,83.274 72.927,83.274 DEV.1@72.165,84.036 71.022,85.179 71.022,85.306 71.022,87.719 71.149,87.846 75.34,87.846 76.166,87.02 U6.7@80.204,87.02 ; R20.1@75.656,96.101 73.689,96.101 72.927,96.101 DEV.1@72.165,96.863 71.022,98.006 71.022,98.133 71.022,100.546 71.149,100.673 75.34,100.673 76.166,99.847 U4.7@80.204,99.847 ; R15.1@75.656,109.309 73.689,109.309 72.927,109.309 DEV.1@72.165,110.071 71.022,111.214 71.022,111.341 71.022,113.754 71.149,113.881 75.34,113.881 76.166,113.055 U3.7@80.204,113.055 ; R95.1@97.5,57.239 95.533,57.239 94.771,57.239 DEV.1@94.009,58.001 92.866,59.144 92.866,59.271 92.866,61.684 92.993,61.811 97.184,61.811 98.01,60.985 U19.7@102.048,60.985 ; R100.1@97.5,70.447 95.533,70.447 94.771,70.447 DEV.1@94.009,71.209 92.866,72.352 92.866,72.479 92.866,74.892 92.993,75.019 97.184,75.019 98.01,74.193 U20.7@102.048,74.193 ; R35.1@97.5,96.355 95.533,96.355 94.771,96.355 DEV.1@94.009,97.117 92.866,98.26 92.866,98.387 92.866,100.8 92.993,100.927 97.184,100.927 98.01,100.101 U7.7@102.048,100.101 ; R40.1@97.5,109.563 95.533,109.563 94.771,109.563 DEV.1@94.009,110.325 92.866,111.468 92.866,111.595 92.866,114.008 92.993,114.135 97.184,114.135 98.01,113.309 U8.7@102.048,113.309 ; R115.1@97.538,44.374 95.571,44.374 94.809,44.374 DEV.1@94.047,45.136 92.904,46.279 92.904,46.406 92.904,48.819 93.031,48.946 97.222,48.946 98.048,48.12 U23.7@102.086,48.12 ; R55.1@97.538,83.49 95.571,83.49 94.809,83.49 DEV.1@94.047,84.252 92.904,85.395 92.904,85.522 92.904,87.935 93.031,88.062 97.222,88.062 98.048,87.236 U11.7@102.086,87.236 ; R120.1@119.255,44.12 117.288,44.12 116.526,44.12 DEV.1@115.764,44.882 114.621,46.025 114.621,46.152 114.621,48.565 114.748,48.692 118.939,48.692 119.765,47.866 U24.7@123.803,47.866 ; R110.1@119.255,56.947 117.288,56.947 116.526,56.947 DEV.1@115.764,57.709 114.621,58.852 114.621,58.979 114.621,61.392 114.748,61.519 118.939,61.519 119.765,60.693 U22.7@123.803,60.693 ; R105.1@119.255,70.155 117.288,70.155 116.526,70.155 DEV.1@115.764,70.917 114.621,72.06 114.621,72.187 114.621,74.6 114.748,74.727 118.939,74.727 119.765,73.901 U21.7@123.803,73.901 ; R60.1@119.255,83.236 117.288,83.236 116.526,83.236 DEV.1@115.764,83.998 114.621,85.141 114.621,85.268 114.621,87.681 114.748,87.808 118.939,87.808 119.765,86.982 U12.7@123.803,86.982 ; R50.1@119.255,96.063 117.288,96.063 116.526,96.063 DEV.1@115.764,96.825 114.621,97.968 114.621,98.095 114.621,100.508 114.748,100.635 118.939,100.635 119.765,99.809 U10.7@123.803,99.809 ; R45.1@119.255,109.271 117.288,109.271 116.526,109.271 DEV.1@115.764,110.033 114.621,111.176 114.621,111.303 114.621,113.716 114.748,113.843 118.939,113.843 119.765,113.017 U9.7@123.803,113.017
SDAOUT: HOST.1 R4.1 R7.1 R12.1 R17.1 R22.1 R27.1 R32.1 R37.1 R42.1 R47.1 R52.1 R57.1 R62.1 R67.1 R72.1 R77.1 R82.1 R87.1 R92.1 R97.1 R102.1 R107.1 R112.1 R117.1 U1.6 U2.6 U3.6 U4.6 U5.6 U6.6 U7.6 U8.6 U9.6 U10.6 U11.6 U12.6 U13.6 U14.6 U15.6 U16.6 U17.6 U18.6 U19.6 U20.6 U21.6 U22.6 U23.6 U24.6 | length 364.1
  Top Layer w0.16: U13.6@58.449,61.658 59.618,61.658 60.062,62.103 ; U14.6@58.449,74.867 59.618,74.867 60.062,75.311 ; U1.6@58.449,100.774 59.618,100.774 60.062,101.219 ; U2.6@58.449,113.983 59.618,113.983 60.062,114.427 ; U17.6@58.487,48.793 59.656,48.793 60.1,49.238 ; U5.6@58.487,87.909 59.656,87.909 60.1,88.354 ; v1(60.189,61.595) 60.062,61.722 60.062,62.103 ; v1(60.189,74.803) 60.062,74.93 60.062,75.311 ; v1(60.189,100.711) 60.062,100.838 60.062,101.219 ; v1(60.189,113.919) 60.062,114.046 60.062,114.427 ; v1(60.227,48.73) 60.1,48.857 60.1,49.238 ; v1(60.227,87.846) 60.1,87.973 60.1,88.354 ; R62.1@61.586,64.959 60.062,63.435 60.062,62.103 ; R67.1@61.586,78.167 60.062,76.643 60.062,75.311 ; R4.1@61.586,104.075 60.062,102.551 60.062,101.219 ; R7.1@61.586,117.283 60.062,115.759 60.062,114.427 ; R82.1@61.624,52.094 60.1,50.57 60.1,49.238 ; R22.1@61.624,91.21 60.1,89.686 60.1,88.354 ; U18.6@80.204,48.539 81.373,48.539 81.817,48.984 ; U16.6@80.204,61.366 81.373,61.366 81.817,61.811 ; U15.6@80.204,74.574 81.373,74.574 81.817,75.019 ; U6.6@80.204,87.655 81.373,87.655 81.817,88.1 ; U4.6@80.204,100.482 81.373,100.482 81.817,100.927 ; U3.6@80.204,113.69 81.373,113.69 81.817,114.135 ; v1(81.944,48.476) 81.817,48.603 81.817,48.984 ; v1(81.944,61.303) 81.817,61.43 81.817,61.811 ; v1(81.944,74.511) 81.817,74.638 81.817,75.019 ; v1(81.944,87.592) 81.817,87.719 81.817,88.1 ; v1(81.944,100.419) 81.817,100.546 81.817,100.927 ; v1(81.944,113.627) 81.817,113.754 81.817,114.135 ; R87.1@83.341,51.84 81.817,50.316 81.817,48.984 ; R77.1@83.341,64.667 81.817,63.143 81.817,61.811 ; R72.1@83.341,77.875 81.817,76.351 81.817,75.019 ; R27.1@83.341,90.956 81.817,89.432 81.817,88.1 ; R17.1@83.341,103.783 81.817,102.259 81.817,100.927 ; R12.1@83.341,116.991 81.817,115.467 81.817,114.135 ; U19.6@102.048,61.62 103.217,61.62 103.661,62.065 ; U20.6@102.048,74.828 103.217,74.828 103.661,75.273 ; U7.6@102.048,100.736 103.217,100.736 103.661,101.181 ; U8.6@102.048,113.944 103.217,113.944 103.661,114.389 ; U23.6@102.086,48.755 103.255,48.755 103.699,49.2 ; U11.6@102.086,87.871 103.255,87.871 103.699,88.316 ; v1(103.788,61.557) 103.661,61.684 103.661,62.065 ; v1(103.788,74.765) 103.661,74.892 103.661,75.273 ; v1(103.788,100.673) 103.661,100.8 103.661,101.181 ; v1(103.788,113.881) 103.661,114.008 103.661,114.389 ; v1(103.826,48.692) 103.699,48.819 103.699,49.2 ; v1(103.826,87.808) 103.699,87.935 103.699,88.316 ; R92.1@105.185,64.921 103.661,63.397 103.661,62.065 ; R97.1@105.185,78.129 103.661,76.605 103.661,75.273 ; R32.1@105.185,104.037 103.661,102.513 103.661,101.181 ; R37.1@105.185,117.245 103.661,115.721 103.661,114.389 ; R112.1@105.223,52.056 103.699,50.532 103.699,49.2 ; R52.1@105.223,91.172 103.699,89.648 103.699,88.316 ; U24.6@123.803,48.501 124.972,48.501 125.416,48.946 ; U22.6@123.803,61.328 124.972,61.328 125.416,61.773 ; U21.6@123.803,74.536 124.972,74.536 125.416,74.981 ; U12.6@123.803,87.617 124.972,87.617 125.416,88.062 ; U10.6@123.803,100.444 124.972,100.444 125.416,100.889 ; U9.6@123.803,113.652 124.972,113.652 125.416,114.097 ; v1(125.543,48.438) 125.416,48.565 125.416,48.946 ; v1(125.543,61.265) 125.416,61.392 125.416,61.773 ; v1(125.543,74.473) 125.416,74.6 125.416,74.981 ; v1(125.543,87.554) 125.416,87.681 125.416,88.062 ; v1(125.543,100.381) 125.416,100.508 125.416,100.889 ; v1(125.543,113.589) 125.416,113.716 125.416,114.097 ; R117.1@126.94,51.802 125.416,50.278 125.416,48.946 ; R107.1@126.94,64.629 125.416,63.105 125.416,61.773 ; R102.1@126.94,77.837 125.416,76.313 125.416,74.981 ; R57.1@126.94,90.918 125.416,89.394 125.416,88.062 ; R47.1@126.94,103.745 125.416,102.221 125.416,100.889 ; R42.1@126.94,116.953 125.416,115.429 125.416,114.097
  Bottom Layer w0.16: v1(60.189,61.595) 60.824,60.96 64.507,60.96 67.682,57.785 HOST.1@67.936,57.785 ; v1(60.189,74.803) 60.824,74.168 64.507,74.168 67.682,70.993 HOST.1@67.936,70.993 ; v1(60.189,100.711) 60.824,100.076 64.507,100.076 67.682,96.901 HOST.1@67.936,96.901 ; v1(60.189,113.919) 60.824,113.284 64.507,113.284 67.682,110.109 HOST.1@67.936,110.109 ; v1(60.227,48.73) 60.862,48.095 64.545,48.095 67.72,44.92 HOST.1@67.974,44.92 ; v1(60.227,87.846) 60.862,87.211 64.545,87.211 67.72,84.036 HOST.1@67.974,84.036 ; v1(81.944,48.476) 82.579,47.841 86.262,47.841 89.437,44.666 HOST.1@89.691,44.666 ; v1(81.944,61.303) 82.579,60.668 86.262,60.668 89.437,57.493 HOST.1@89.691,57.493 ; v1(81.944,74.511) 82.579,73.876 86.262,73.876 89.437,70.701 HOST.1@89.691,70.701 ; v1(81.944,87.592) 82.579,86.957 86.262,86.957 89.437,83.782 HOST.1@89.691,83.782 ; v1(81.944,100.419) 82.579,99.784 86.262,99.784 89.437,96.609 HOST.1@89.691,96.609 ; v1(81.944,113.627) 82.579,112.992 86.262,112.992 89.437,109.817 HOST.1@89.691,109.817 ; v1(103.788,61.557) 104.423,60.922 108.106,60.922 111.281,57.747 HOST.1@111.535,57.747 ; v1(103.788,74.765) 104.423,74.13 108.106,74.13 111.281,70.955 HOST.1@111.535,70.955 ; v1(103.788,100.673) 104.423,100.038 108.106,100.038 111.281,96.863 HOST.1@111.535,96.863 ; v1(103.788,113.881) 104.423,113.246 108.106,113.246 111.281,110.071 HOST.1@111.535,110.071 ; v1(103.826,48.692) 104.461,48.057 108.144,48.057 111.319,44.882 HOST.1@111.573,44.882 ; v1(103.826,87.808) 104.461,87.173 108.144,87.173 111.319,83.998 HOST.1@111.573,83.998 ; v1(125.543,48.438) 126.178,47.803 129.861,47.803 133.036,44.628 HOST.1@133.29,44.628 ; v1(125.543,61.265) 126.178,60.63 129.861,60.63 133.036,57.455 HOST.1@133.29,57.455 ; v1(125.543,74.473) 126.178,73.838 129.861,73.838 133.036,70.663 HOST.1@133.29,70.663 ; v1(125.543,87.554) 126.178,86.919 129.861,86.919 133.036,83.744 HOST.1@133.29,83.744 ; v1(125.543,100.381) 126.178,99.746 129.861,99.746 133.036,96.571 HOST.1@133.29,96.571 ; v1(125.543,113.589) 126.178,112.954 129.861,112.954 133.036,109.779 HOST.1@133.29,109.779
U1_5: R5.1 R8.1 R13.1 R18.1 R23.1 R28.1 R33.1 R38.1 R43.1 R48.1 R53.1 R58.1 R63.1 R68.1 R73.1 R78.1 R83.1 R88.1 R93.1 R98.1 R103.1 R108.1 R113.1 R118.1 U1.5 U2.5 U3.5 U4.5 U5.5 U6.5 U7.5 U8.5 U9.5 U10.5 U11.5 U12.5 U13.5 U14.5 U15.5 U16.5 U17.5 U18.5 U19.5 U20.5 U21.5 U22.5 U23.5 U24.5 | length 59.1
  Top Layer w0.16: 57.903,64.451 57.776,64.324 57.776,63.246 58.449,62.573 U13.5@58.449,62.319 ; 57.903,77.659 57.776,77.532 57.776,76.454 58.449,75.781 U14.5@58.449,75.527 ; 57.903,103.567 57.776,103.44 57.776,102.362 58.449,101.689 U1.5@58.449,101.435 ; 57.903,116.775 57.776,116.648 57.776,115.57 58.449,114.897 U2.5@58.449,114.643 ; 57.941,51.586 57.814,51.459 57.814,50.381 58.487,49.708 U17.5@58.487,49.454 ; 57.941,90.702 57.814,90.575 57.814,89.497 58.487,88.824 U5.5@58.487,88.57 ; 79.658,51.332 79.531,51.205 79.531,50.127 80.204,49.454 U18.5@80.204,49.2 ; 79.658,64.159 79.531,64.032 79.531,62.954 80.204,62.281 U16.5@80.204,62.027 ; 79.658,77.367 79.531,77.24 79.531,76.162 80.204,75.489 U15.5@80.204,75.235 ; 79.658,90.448 79.531,90.321 79.531,89.243 80.204,88.57 U6.5@80.204,88.316 ; 79.658,103.275 79.531,103.148 79.531,102.07 80.204,101.397 U4.5@80.204,101.143 ; 79.658,116.483 79.531,116.356 79.531,115.278 80.204,114.605 U3.5@80.204,114.351 ; 101.502,64.413 101.375,64.286 101.375,63.208 102.048,62.535 U19.5@102.048,62.281 ; 101.502,77.621 101.375,77.494 101.375,76.416 102.048,75.743 U20.5@102.048,75.489 ; 101.502,103.529 101.375,103.402 101.375,102.324 102.048,101.651 U7.5@102.048,101.397 ; 101.502,116.737 101.375,116.61 101.375,115.532 102.048,114.859 U8.5@102.048,114.605 ; 101.54,51.548 101.413,51.421 101.413,50.343 102.086,49.67 U23.5@102.086,49.416 ; 101.54,90.664 101.413,90.537 101.413,89.459 102.086,88.786 U11.5@102.086,88.532 ; 123.257,51.294 123.13,51.167 123.13,50.089 123.803,49.416 U24.5@123.803,49.162 ; 123.257,64.121 123.13,63.994 123.13,62.916 123.803,62.243 U22.5@123.803,61.989 ; 123.257,77.329 123.13,77.202 123.13,76.124 123.803,75.451 U21.5@123.803,75.197 ; 123.257,90.41 123.13,90.283 123.13,89.205 123.803,88.532 U12.5@123.803,88.278 ; 123.257,103.237 123.13,103.11 123.13,102.032 123.803,101.359 U10.5@123.803,101.105 ; 123.257,116.445 123.13,116.318 123.13,115.24 123.803,114.567 U9.5@123.803,114.313

## Polygon pours and split planes (outlines as drawn)
GND on Bottom Layer (solid): 45.203,38.481 45.583,123.443 45.203,123.444 45.584,123.698 45.583,123.443 138.421,123.19 138.04,38.1 45.203,38.481
GND on Top Layer (solid): 43.933,41.021 44.313,125.983 43.933,125.984 44.314,126.238 44.313,125.983 137.151,125.73 136.77,40.64 43.933,41.021

## Silkscreen, mask and mechanical layers (free items; w line width, h text height)
Top Overlay:
  drawing of 288 lines, arcs and shapes, not listed
Bottom Overlay:
  text "I2C-RELAY" at 54.347,120.015 h2.03 r180
  text "I2C-RELAY" at 97.946,119.977 h2.03 r180
  text "I2C-RELAY" at 76.102,119.723 h2.03 r180
  text "I2C-RELAY" at 119.701,119.685 h2.03 r180
  text "I2C-RELAY" at 54.347,106.807 h2.03 r180
  text "I2C-RELAY" at 97.946,106.769 h2.03 r180
  text "I2C-RELAY" at 76.102,106.515 h2.03 r180
  text "I2C-RELAY" at 119.701,106.477 h2.03 r180
  text "I2C-RELAY" at 54.385,93.942 h2.03 r180
  text "I2C-RELAY" at 97.984,93.904 h2.03 r180
  text "I2C-RELAY" at 76.102,93.688 h2.03 r180
  text "I2C-RELAY" at 119.701,93.65 h2.03 r180
  text "I2C-RELAY" at 54.347,80.899 h2.03 r180
  text "I2C-RELAY" at 97.946,80.861 h2.03 r180
  text "I2C-RELAY" at 76.102,80.607 h2.03 r180
  text "I2C-RELAY" at 119.701,80.569 h2.03 r180
  text "I2C-RELAY" at 54.347,67.691 h2.03 r180
  text "I2C-RELAY" at 97.946,67.653 h2.03 r180
  text "I2C-RELAY" at 76.102,67.399 h2.03 r180
  text "I2C-RELAY" at 119.701,67.361 h2.03 r180
  text "I2C-RELAY" at 54.385,54.826 h2.03 r180
  text "I2C-RELAY" at 97.984,54.788 h2.03 r180
  text "I2C-RELAY" at 76.102,54.572 h2.03 r180
  text "I2C-RELAY" at 119.701,54.534 h2.03 r180